# EAGLE board Shruthi-Analog-SVF-v01a (EAGLE 5.09)
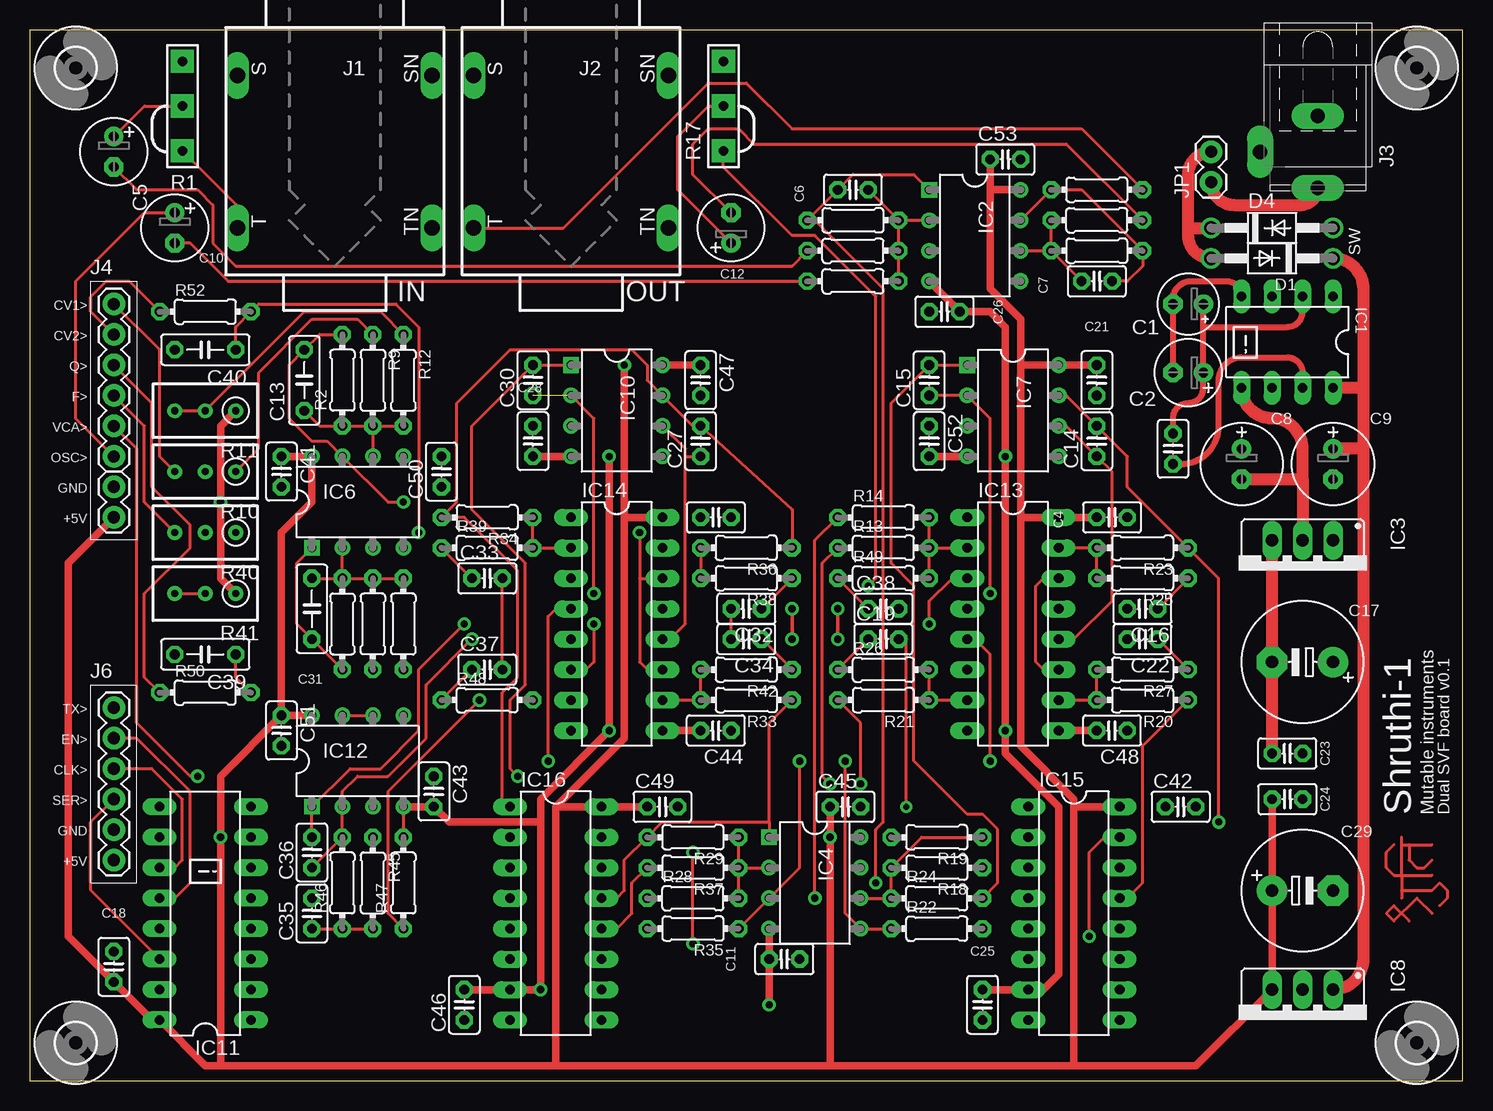
[diagram p0: board, top side]
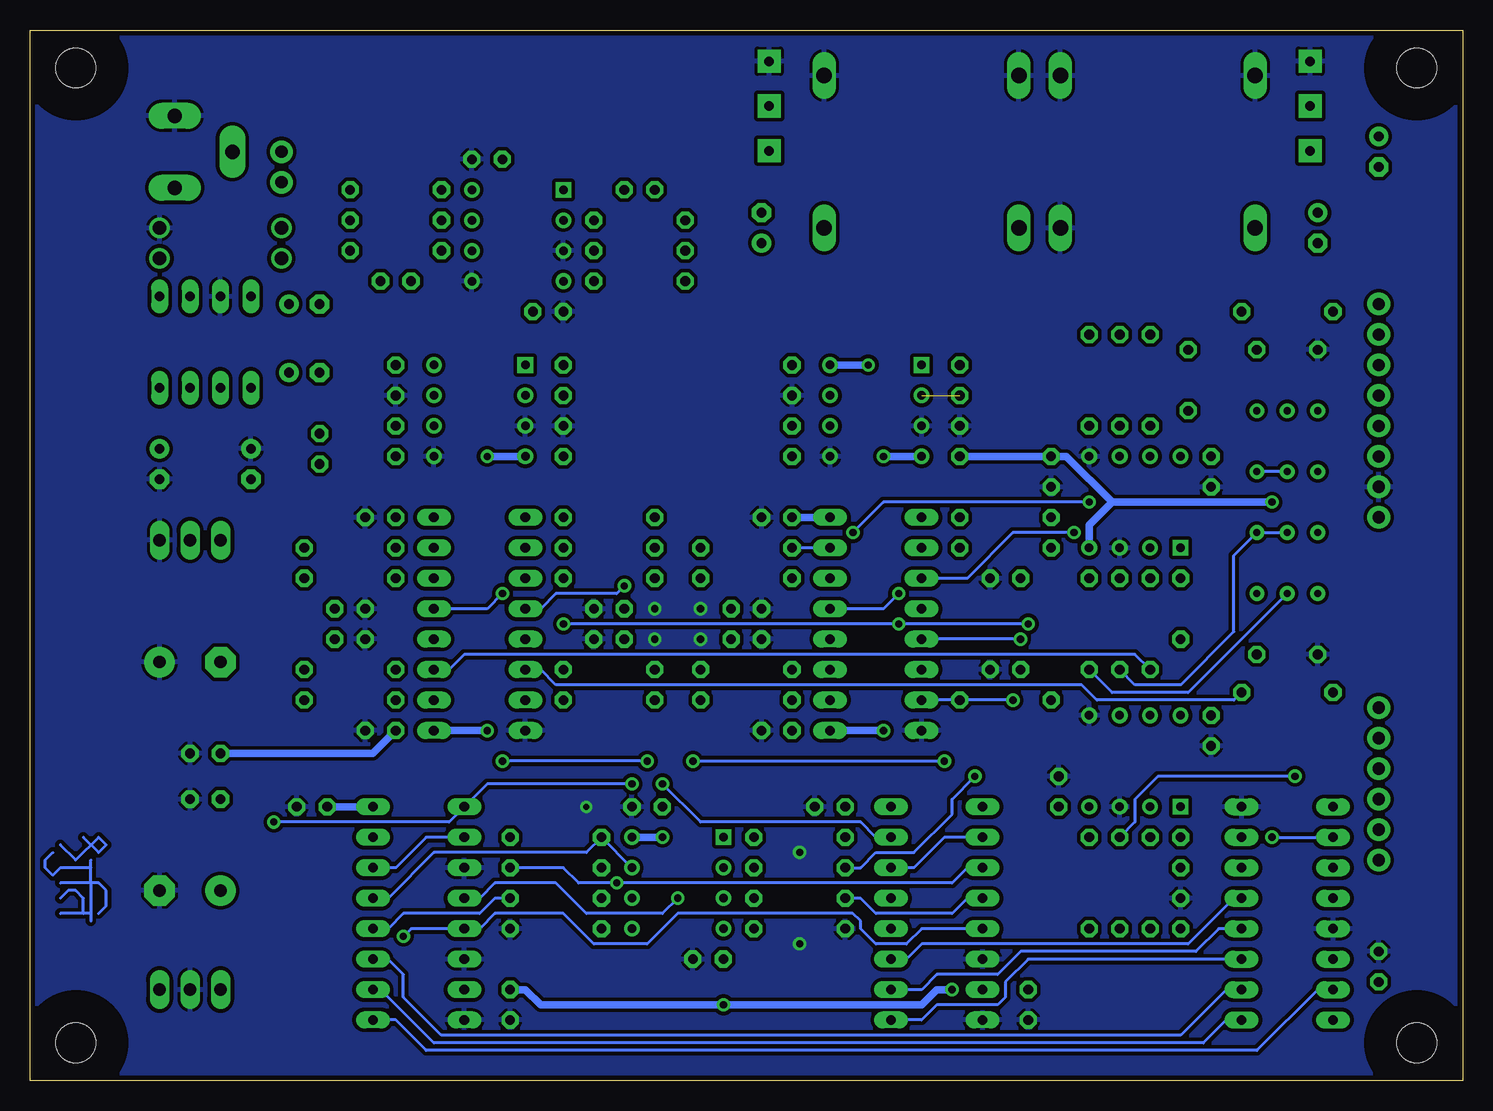
[diagram p1: board, bottom side, seen from below]

Size 119.38 x 87.62 mm. Coordinates in mm from the lower left corner, seen from the top.
Outline: 0,0 119.38,0 119.38,87.62 0,87.62 0,0
Copper layers (1*16): Top 0.035mm / dielectric 1.5mm / Bottom 0.035mm
Design rules "SparkFun_10mil *": minimum track width 10mil, minimum drill 20mil, track to track 10mil, track to pad 10mil, pad to pad 10mil, via to via 10mil, smd to smd 10mil, copper to edge 10mil, drill to drill 10mil, minimum pad ring 12mil, minimum via ring 10mil, stop-mask expansion 4mil, vias tented up to drill 25mil, thermal gap 10mil

## Footprints (pad centres in the part's own frame; a part is rotated, then mirrored left to right if it is on the bottom)
E2,5-5 = drill 0.813 pad 1.6 round: + -1.27,0 | drill 0.813 pad 1.6 octagon: - 1.27,0
E2,5-6 = drill 0.813 pad 1.6 round: + -1.27,0 | drill 0.813 pad 1.6 octagon: - 1.27,0
C025-025X050 = drill 0.813 octagon: 1 -1.27,0; 2 1.27,0
E2,5-7 = drill 0.813 pad 1.6 round: + -1.27,0 | drill 0.813 pad 1.6 octagon: - 1.27,0
C050-025X075 = drill 0.813 octagon: 1 -2.54,0; 2 2.54,0
E5-10,5 = drill 1.016 pad 2.54 round: + -2.54,0 | drill 1.016 pad 2.54 octagon: - 2.54,0
DO41-10 = drill 1.118 round: A 5.08,0; C -5.08,0
DIL08 = drill 0.813 long: 1 -3.81,-3.81; 2 -1.27,-3.81; 3 1.27,-3.81; 4 3.81,-3.81; 5 3.81,3.81; 6 1.27,3.81; 7 -1.27,3.81; 8 -3.81,3.81
DIL08' = drill 0.7 square: 1 -3.81,-3.81 | drill 0.7 round: 2 -1.27,-3.81; 3 1.27,-3.81; 4 3.81,-3.81; 5 3.81,3.81; 6 1.27,3.81; 7 -1.27,3.81; 8 -3.81,3.81
79XXS = drill 1.016 long: GND -2.54,-2.54; IN 0,-2.54; OUT 2.54,-2.54
78XXS = drill 1.016 long: GND 0,-2.54; IN -2.54,-2.54; OUT 2.54,-2.54
DIL16 = drill 0.813 long: 1 -8.89,-3.81; 2 -6.35,-3.81; 3 -3.81,-3.81; 4 -1.27,-3.81; 5 1.27,-3.81; 6 3.81,-3.81; 7 6.35,-3.81; 8 8.89,-3.81; 9 8.89,3.81; 10 6.35,3.81; 11 3.81,3.81; 12 1.27,3.81; 13 -1.27,3.81; 14 -3.81,3.81; 15 -6.35,3.81; 16 -8.89,3.81
NMJ4HC-S = drill 1.3 long: S 5.08,8.115; SN 5.08,-8.115; T -7.62,8.115; TN -7.62,-8.115
SPC4078_LARGER_HOLES = drill 1.2 pad 2.184 long: 1 -3,0; 2 0,-4.8; 3 3,0
1X06 = drill 1.016 pad 1.88 round: 1 0,0; 2 2.54,0; 3 5.08,0; 4 7.62,0; 5 10.16,0; 6 12.7,0
1X02 = drill 1.016 pad 1.88 round: 1 0,0; 2 2.54,0
CABLE_POT_6MM = drill 0.8 pad 1.93 square: A -3.73,0; E 3.73,0; S 0,0
0204/7 = drill 0.813 octagon: 1 -3.81,0; 2 3.81,0
RTRIM3296W = drill 0.61 round: 1 0,-2.54; 2 0,0; 3 0,2.54
3,3 = hole 3.3: 0,0

## Placement (x,y rotation side)
C1  10u  [E2,5-5]  96.52,64.77 180 top
C2  100u  [E2,5-6]  96.52,59.05 180 top
C3  10p  [C025-025X050]  95.25,52.71 270 top
C4  100n  [C025-025X050]  90.17,46.99 0 top
C5  4.7u  [E2,5-6]  6.99,77.47 270 top
C6  68p  [C025-025X050]  68.58,74.3 180 top
C7  100p  [C025-025X050]  88.9,66.67 0 top
C8  100u  [E2,5-7]  100.97,51.44 270 top
C9  100u  [E2,5-7]  108.58,51.44 270 top
C10  4.7u  [E2,5-6]  12.07,71.12 270 top
C11  100n  [C025-025X050]  62.87,10.16 180 top
C12  4.7u  [E2,5-6]  58.42,71.12 90 top
C13  33n  [C050-025X075]  22.86,58.42 90 top
C14  220p  [C025-025X050]  88.9,53.34 90 top
C15  220p  [C025-025X050]  74.93,58.42 90 top
C16  560p  [C025-025X050]  92.71,39.37 180 top
C17  220u  [E5-10,5]  106.05,34.92 180 top
C18  100n  [C025-025X050]  6.99,9.53 90 top
C19  560p  [C025-025X050]  71.12,36.83 0 top
C20  100n  [C025-025X050]  57.15,46.99 0 top
C21  100n  [C025-025X050]  88.9,58.42 270 top
C22  560p  [C025-025X050]  92.71,36.83 180 top
C23  100n  [C025-025X050]  104.78,27.3 180 top
C24  100n  [C025-025X050]  104.78,23.49 0 top
C25  100n  [C025-025X050]  79.38,6.35 90 top
C26  100n  [C025-025X050]  76.2,64.14 0 top
C27  220p  [C025-025X050]  55.88,53.34 90 top
C28  100n  [C025-025X050]  41.91,53.34 270 top
C29  220u  [E5-10,5]  106.05,15.88 0 top
C30  220p  [C025-025X050]  41.91,58.42 90 top
C31  33n  [C050-025X075]  23.5,39.37 270 top
C32  560p  [C025-025X050]  59.69,39.37 180 top
C33  560p  [C025-025X050]  38.1,41.91 0 top
C34  560p  [C025-025X050]  59.69,36.83 180 top
C35  6.8n  [C025-025X050]  23.5,13.97 90 top
C36  100p  [C025-025X050]  23.5,19.05 90 top
C37  560p  [C025-025X050]  38.1,34.29 0 top
C38  560p  [C025-025X050]  71.12,39.37 0 top
C39  33n  [C050-025X075]  14.61,35.56 180 top
C40  33n  [C050-025X075]  14.61,60.96 180 top
C41  100n  [C025-025X050]  20.96,50.8 270 top
C42  100n  [C025-025X050]  95.89,22.86 0 top
C43  100n  [C025-025X050]  33.66,24.13 270 top
C44  100n  [C025-025X050]  57.15,29.21 180 top
C45  100n  [C025-025X050]  67.95,22.86 0 top
C46  100n  [C025-025X050]  36.2,6.35 90 top
C47  100n  [C025-025X050]  55.88,58.42 270 top
C48  100n  [C025-025X050]  90.17,29.21 180 top
C49  100n  [C025-025X050]  52.7,22.86 0 top
C50  100n  [C025-025X050]  34.29,50.8 90 top
C51  100n  [C025-025X050]  20.96,29.21 270 top
C52  100n  [C025-025X050]  74.93,53.34 270 top
C53  100n  [C025-025X050]  81.28,76.84 0 top
D1  1N5819  [DO41-10]  103.5,68.58 180 top
D4  1N5819  [DO41-10]  103.5,71.12 0 top
IC1  LT1054  [DIL08]  104.78,61.59 180 top
IC2  TL072P  [DIL08']  78.74,70.48 270 top
IC3  7905  [79XXS]  106.05,42.55 180 top
IC4  TL072P  [DIL08']  65.41,16.51 270 top
IC6  TL082P  [DIL08']  27.3,48.26 0 top
IC7  TL072P  [DIL08']  81.92,55.88 270 top
IC8  7805  [78XXS]  106.05,5.08 180 top
IC10  TL072P  [DIL08']  48.89,55.88 270 top
IC11  74HC595N  [DIL16]  14.61,13.97 90 top
IC12  TL082P  [DIL08']  27.3,26.67 0 top
IC13  SSM2164P  [DIL16]  81.92,38.1 270 top
IC14  SSM2164P  [DIL16]  48.89,38.1 270 top
IC15  4053N  [DIL16]  87,13.97 270 top
IC16  4053N  [DIL16]  43.81,13.97 270 top
J1  MONOSWS  [NMJ4HC-S]  25.4,78.74 90 top
J2  MONOSWS  [NMJ4HC-S]  45.09,78.74 90 top
J3  [SPC4078_LARGER_HOLES]  107.31,77.47 270 top
J4  [1X06]  6.99,52.07 90 top
J5  [1X02]  6.99,49.53 270 top
J6  [1X06]  6.99,18.41 90 top
JP1  [1X02]  98.42,74.93 90 top
R1  10kA  [CABLE_POT_6MM]  12.7,81.28 270 top
R2  15k  [0204/7]  26.04,58.42 90 top
R3  68  [0204/7]  88.9,74.3 180 top
R4  100k  [0204/7]  68.58,71.75 180 top
R5  10k  [0204/7]  68.58,69.22 0 top
R6  68k  [0204/7]  88.9,69.22 180 top
R7  100k  [0204/7]  68.58,66.67 0 top
R8  33k  [0204/7]  88.9,71.75 0 top
R9  33k  [0204/7]  28.57,58.42 270 top
R10  5k  [RTRIM3296W]  14.61,50.8 90 top
R11  5k  [RTRIM3296W]  14.61,55.88 90 top
R12  33k  [0204/7]  31.11,58.42 270 top
R13  33k  [0204/7]  71.12,44.45 0 top
R14  33k  [0204/7]  71.12,46.99 0 top
R17  10kA  [CABLE_POT_6MM]  57.78,81.28 270 top
R18  33k  [0204/7]  75.56,17.78 180 top
R19  33k  [0204/7]  75.56,20.32 180 top
R20  33k  [0204/7]  92.71,31.75 180 top
R21  33k  [0204/7]  71.12,31.75 180 top
R22  22k  [0204/7]  75.56,12.7 0 top
R23  33k  [0204/7]  92.71,44.45 180 top
R24  33k  [0204/7]  75.56,15.24 0 top
R25  470  [0204/7]  92.71,41.91 180 top
R26  470  [0204/7]  71.12,34.29 0 top
R27  470  [0204/7]  92.71,34.29 180 top
R28  33k  [0204/7]  55.24,15.24 0 top
R29  33k  [0204/7]  55.24,20.32 180 top
R30  33k  [0204/7]  28.57,38.1 90 top
R31  15k  [0204/7]  26.04,38.1 270 top
R32  33k  [0204/7]  31.11,38.1 90 top
R33  33k  [0204/7]  59.69,31.75 180 top
R34  33k  [0204/7]  38.1,46.99 180 top
R35  22k  [0204/7]  55.24,12.7 180 top
R36  33k  [0204/7]  59.69,44.45 180 top
R37  33k  [0204/7]  55.24,17.78 180 top
R38  470  [0204/7]  59.69,41.91 180 top
R39  470  [0204/7]  38.1,44.45 0 top
R40  5k  [RTRIM3296W]  14.61,45.72 90 top
R41  5k  [RTRIM3296W]  14.61,40.64 90 top
R42  470  [0204/7]  59.69,34.29 180 top
R45  100k  [0204/7]  28.57,16.51 270 top
R46  100k  [0204/7]  26.04,16.51 90 top
R47  100k  [0204/7]  31.11,16.51 90 top
R48  470  [0204/7]  38.1,31.75 0 top
R49  470  [0204/7]  71.12,41.91 0 top
R50  33k  [0204/7]  14.61,32.38 0 top
R52  33k  [0204/7]  14.61,64.14 0 top
U$1  [DURGA]  57.78,47.62 0 top
U$2  [3,3]  3.81,84.45 0 top
U$3  [3,3]  115.57,84.45 0 top
U$4  [3,3]  3.81,3.17 0 top
U$5  [3,3]  115.57,3.17 0 top

## Library data of the parts
C1-C53 R2-R14 R18-R42 R45-R50 R52 = rcl
D1 D4 = diode
IC1 = ic-package
IC2 IC4 IC6 IC7 IC10 IC12 = gm-ics
IC3 IC8 = v-reg
IC11 = 74xx-eu
IC13 IC14 = ssm2164
IC15 IC16 = 40xx
J1 J2 = gm-jacks
J3 = con-jack2
J4-J6 JP1 = SparkFun
R1 R17 = pot-cable
U$1 = og-pcb-art
U$2-U$5 = holes

## Nets
BP1: C14.2 IC7.7 IC15.1 R21.2 R23.1
BP2: C27.2 IC10.7 IC16.1 R34.2 R36.1
F1SW0: IC11.15 IC15.9
F1SW1: IC11.1 IC15.10
F1SW2: IC11.2 IC15.11
F2SW0: IC11.3 IC16.9
F2SW1: IC11.4 IC16.10
F2SW2: IC11.5 IC16.11
FILTER1_MIX: IC15.4 R14.1
FILTER1_OUT: IC15.5 IC15.15 IC16.5
FILTER2_OUT: IC16.15 R13.1
FREQ1: C31.2 IC6.1 IC13.11 IC13.14 R31.2
FREQ2: C13.2 IC6.7 IC14.11 IC14.14 R2.2
GND: C4.2 C8.+ C9.- C11.1 C16.2 C17.+ C18.2 C19.2 C20.2 C21.2 C22.2 C23.1 C24.2 C25.1 C26.1 C28.1 C29.- C32.2 C33.2 C34.2 C35.2 C37.2 C38.2 C39.2 C40.2 C41.2 C42.2 C43.1 C44.1 C45.2 C46.1 C47.2 C48.1 C49.2 C50.1 C51.2 C52.1 C53.2 D4.A IC1.3 IC2.3 IC2.5 IC3.GND IC6.3 IC6.5 IC7.3 IC7.5 IC8.GND IC10.3 IC10.5 IC11.8 IC11.13 IC12.3 IC12.5 IC13.8 IC14.8 IC15.3 IC15.6 IC15.8 IC16.6 IC16.8 J1.S J1.SN J1.TN J2.S J2.SN J3.1 J5.1 R1.A R17.A R22.2 R35.2
HP1: IC4.7 IC15.13 R19.2 R20.1
HP2: IC4.1 IC16.13 R29.2 R33.1
LP1: C15.2 IC7.1 IC15.12 R24.2
LP2: C30.2 IC10.1 IC16.12 R37.2
MIX: C6.2 IC2.1 IC16.3 R4.2 R18.1
N$1: C1.+ C2.+ C3.1 IC1.2
N$2: C13.1 IC6.6 R2.1 R9.2 R12.2
N$3: J3.3 JP1.1
N$4: C9.+ D1.C IC1.8 IC8.IN
N$5: C1.- C2.- IC1.4
N$6: C6.1 IC2.2 R4.1 R5.2 R7.2
N$7: R9.1 R10.1 R10.2
N$8: J4.6 R10.3
N$9: R11.2 R11.3 R12.1
N$10: IC14.7 R47.1 R48.2
N$11: C36.1 IC12.2 IC14.5 R46.2
N$12: IC4.6 R18.2 R19.1 R24.1
N$13: IC11.12 J6.5
N$14: IC11.14 J6.3
N$16: IC11.11 J6.4
N$17: C16.1 R25.1
N$18: IC4.2 R28.2 R29.1 R37.1
N$19: C14.1 IC7.6 IC13.12
N$20: C27.1 IC10.6 IC14.12
N$21: IC13.7 R21.1 R26.2
N$22: C35.1 R45.2 R46.1
N$23: IC4.5 IC13.5 R22.1
N$24: IC14.2 R34.1 R39.2
N$25: C12.- R8.2
N$26: IC13.15 R23.2 R25.2
N$27: C19.1 R26.1
N$28: C15.1 IC7.2 IC13.13
N$29: IC13.10 R20.2 R27.2
N$30: C22.1 R27.1
N$32: C12.+ R17.S
N$33: IC4.3 IC14.4 R35.1
N$34: IC14.15 R36.2 R38.2
N$35: C10.+ J4.1
N$36: C3.2 IC1.7
N$38: J1.T R1.E
N$39: C10.- R7.1
N$40: C31.1 IC6.2 R30.2 R31.1 R32.2
N$41: R30.1 R40.1 R40.2
N$42: J4.3 R40.3
N$43: R32.1 R41.2 R41.3
N$44: C30.1 IC10.2 IC14.13
N$45: J4.2 R45.1
N$46: C32.1 R38.1
N$47: J2.T R3.1
N$49: C33.1 R39.1
N$50: IC14.10 R33.2 R42.2
N$51: C34.1 R42.1
N$56: C36.2 IC12.1 IC13.3 IC14.6
N$58: C8.- IC1.5 IC3.IN
N$59: D1.A D4.C JP1.2
N$61: IC12.6 IC12.7
N$62: IC15.2 IC15.14
N$63: C7.2 IC2.7 R3.2 R6.1
N$64: C37.1 R48.1
N$65: C38.1 R49.1
N$66: C5.+ R1.S
N$67: IC13.2 R13.2 R14.2 R49.2
N$68: IC13.4 R17.E
N$69: J4.4 R50.1
N$70: C7.1 IC2.6 R6.2 R8.1
N$72: C5.- R5.1
N$73: J4.5 R52.1
N$74: IC16.2 IC16.14
N$75: IC16.4 R28.1
RES1_CV: C39.1 IC13.6 R50.2
RES2_CV: C40.1 IC14.3 R52.2
VCC: C4.1 C18.1 C20.1 C21.1 C24.1 C29.+ C41.1 C42.1 C45.1 C47.1 C49.1 C51.1 C53.1 IC2.8 IC4.8 IC6.8 IC7.8 IC8.OUT IC10.8 IC11.10 IC11.16 IC12.8 IC13.16 IC14.16 IC15.16 IC16.16 J5.2
VEE: C11.2 C17.- C23.2 C25.2 C26.2 C28.2 C43.2 C44.2 C46.2 C48.2 C50.2 C52.2 IC2.4 IC3.OUT IC4.4 IC6.4 IC7.4 IC10.4 IC12.4 IC13.9 IC14.9 IC15.7 IC16.7 R11.1 R41.1 R47.2

## Tracks (layer width: path | path; a pad name or v marks a point on that pad's centre or on a via)
BP1  (via drill 0.6)
  Top 0.254: IC7.7 86.36,57.15 C14.2 91.44,52.07 91.44,49.53 R23.1 99.06,41.91 v99.06,21.59 | R21.2 69.22,29.84 v69.22,24.76
  Bottom 0.254: v99.06,21.59 84.45,21.59 IC15.1 81.28,24.76 v69.22,24.76
BP2
  Top 0.254: R36.1 63.5,47.62 C27.2 55.24,54.61 IC10.7 51.44,58.42 51.44,59.69 50.16,60.96 40.01,60.96 35.56,56.52 35.56,48.26 R34.2 36.2,46.99 40.64,42.55 40.64,33.66 39.37,32.38 39.37,23.49 IC16.1
F1SW0
  Bottom 0.254: IC11.15 12.07,7.62 17.14,2.54 86.36,2.54 88.9,5.08 IC15.9
F1SW1
  Bottom 0.254: IC11.1 19.68,5.08 21.59,3.17 85.72,3.17 90.17,7.62 IC15.10
F1SW2
  Bottom 0.254: IC11.2 19.68,7.62 23.5,3.81 85.09,3.81 88.27,6.98 88.27,8.89 89.53,10.16 IC15.11
F2SW0
  Bottom 0.254: IC11.3 36.2,10.16 38.1,8.26 38.1,6.98 38.73,6.35 43.81,6.35 45.09,5.08 IC16.9
F2SW1
  Bottom 0.254: IC11.4 20.32,12.7 22.23,10.79 36.83,10.79 38.73,8.89 43.81,8.89 45.09,7.62 IC16.10
F2SW2
  Bottom 0.254: IC11.5 19.05,15.24 22.86,11.43 45.09,11.43 46.35,10.16 IC16.11
FILTER1_MIX  (via drill 0.6)
  Top 0.254: R14.1 65.41,45.09 v65.41,15.24
  Bottom 0.254: v65.41,15.24 66.67,13.97 73.03,13.97 75.56,16.51 80.64,16.51 81.92,15.24 IC15.4
FILTER1_OUT  (via drill 0.6)
  Top 0.254: IC15.15 89.53,20.32 88.27,19.05 v88.27,12.07
  Bottom 0.254: IC16.5 45.09,12.7 46.35,11.43 48.89,11.43 50.16,12.7 50.16,13.34 50.8,13.97 65.41,13.97 67.95,11.43 72.39,11.43 74.93,13.97 80.64,13.97 81.92,12.7 IC15.5 87.63,12.7 v88.27,12.07
FILTER2_OUT  (via drill 0.6)
  Top 0.254: R13.1 66.04,43.18 66.04,25.4 v66.67,24.76
  Bottom 0.254: IC16.15 48.89,20.32 50.16,21.59 63.5,21.59 v66.67,24.76
FREQ1
  Top 0.254: IC6.1 22.23,43.18 22.23,38.1 C31.2 R31.2 | IC13.14 84.45,41.91 83.82,41.28 83.82,34.92 84.45,34.29 IC13.11
  Bottom 0.254: R31.2 27.3,35.56 83.19,35.56 84.45,34.29 IC13.11
FREQ2  (via drill 0.6)
  Top 0.254: R2.2 24.13,62.23 C13.2 21.59,59.69 21.59,55.25 23.5,53.34 24.77,53.34 IC6.7 29.84,48.26 v31.11,48.26 | IC14.11 51.44,34.29 50.8,34.92 50.8,41.91 | v50.8,45.72 50.8,41.91 | 50.8,41.91 IC14.14
  Bottom 0.254: v31.11,48.26 48.26,48.26 v50.8,45.72
GND  (via drill 0.51, 0.6)
  Top 0.254: C37.2 C33.2 | C34.2 C32.2 | v73.03,22.86 73.03,36.83 C19.2 | v55.24,11.43 v55.24,19.05
  Top 0.305: v63.5,36.83 v63.5,39.37 | v67.31,36.83 v67.31,39.37
  pour Bottom (isolate 0.305): 0.64,87 0.64,0.64 118.75,0.64 118.75,87
HP1
  Top 0.254: R20.1 92.71,27.94 92.71,16.51 91.44,15.24 IC15.13
  Bottom 0.254: IC15.13 89.53,15.24 85.72,19.05 73.03,19.05 R19.2 IC4.7
HP2
  Top 0.254: IC16.13 48.89,15.24 49.53,15.88 49.53,18.41 R29.2 52.7,21.59 61.59,21.59 | R33.1 61.59,29.84 61.59,21.59 | 61.59,21.59 IC4.1
LP1
  Top 0.254: IC7.1 C15.2 71.75,56.52 71.75,43.18 73.66,41.28 73.66,26.67 78.11,22.22 79.38,22.22 80.64,20.95 80.64,16.51 R24.2
  Bottom 0.254: R24.2 80.64,15.24 81.92,13.97 88.27,13.97 89.53,12.7 IC15.12
LP2  (via drill 0.6)
  Top 0.254: R37.2 50.16,16.51 50.16,13.97 48.89,12.7 IC16.12 | v40.64,25.4 40.01,26.04 40.01,31.75 41.27,33.02 41.27,43.18 36.83,47.62 36.83,54.61 C30.2 IC10.1
  Bottom 0.254: R37.2 50.16,17.78 48.89,19.05 45.72,19.05 42.55,22.22 42.55,23.49 v40.64,25.4
MIX  (via drill 0.6)
  Top 0.254: IC2.1 73.66,75.56 68.58,75.56 C6.2 R4.2 65.41,71.75 71.12,66.04 71.12,21.59 70.48,20.95 v70.48,16.51
  Bottom 0.254: IC16.3 41.27,17.78 42.55,16.51 v70.48,16.51 73.66,16.51 74.93,17.78 R18.1
N$1
  Top 0.508: 97.79,62.87 C2.+ 97.79,57.79 arc-90 96.52,56.52 arc90 95.25,55.25 C3.1 | 97.79,62.87 C1.+ | IC1.2 106.05,64.14 arc-90 104.78,62.87 97.79,62.87
N$2
  Top 0.254: R9.2 R12.2 | R9.2 R2.1 24.13,54.61 C13.1 | R9.2 IC6.6
N$3
  Top 1.016: J3.3 arc-90 105.87,73.03 100.33,73.03 arc-90 JP1.1
N$4
  Top 1.016: IC8.IN arc90 111.12,10.16 111.12,52.71 | D1.C arc-90 111.12,66.04 111.12,57.79 | 111.12,52.71 111.12,57.79 | 111.12,57.79 IC1.8 | 111.12,52.71 C9.+
N$5
  Top 0.508: IC1.4 arc90 99.69,66.67 96.52,66.67 arc90 C1.- C2.-
N$6
  Top 0.254: R4.1 R5.2 R7.2 | R4.1 C6.1 | R4.1 IC2.2
N$7
  Top 0.254: R9.1 27.3,63.5 23.5,63.5 19.05,59.05 19.05,52.71 R10.1
  Bottom 0.254: R10.2 R10.1
N$8
  Top 0.254: J4.6 10.79,60.96 10.79,52.07 R10.3
N$9
  Top 0.254: R11.3 R11.2 22.86,64.14 29.21,64.14 R12.1
N$10  (via drill 0.6)
  Top 0.254: R47.1 29.84,13.97 29.84,24.13 v37.47,31.75
  Bottom 0.254: v37.47,31.75 R48.2 IC14.7
N$11  (via drill 0.6)
  Top 0.254: C36.1 R46.2 IC12.2 26.04,24.13 27.3,25.4 29.84,25.4 33.02,28.57 33.02,33.02 v36.83,36.83
  Bottom 0.254: v36.83,36.83 IC14.5
N$12
  Top 0.254: IC4.6 R24.1 R18.2 74.3,20.32 R19.1
N$13
  Top 0.254: J6.5 8.89,28.57 13.34,24.13 13.34,16.51 12.07,15.24 IC11.12
N$14
  Top 0.254: J6.3 5.08,21.59 5.08,15.88 IC11.14
N$15
  Bottom 0.254: 116.84,19.68 115.57,18.41 113.67,20.32 113.03,19.68 113.67,19.05 114.94,20.32
N$16
  Top 0.254: J6.4 10.16,26.04 12.7,23.49 12.7,18.41 12.07,17.78 IC11.11
N$17
  Top 0.254: C16.1 R25.1
N$18
  Top 0.254: R37.1 IC4.2 | R37.1 R29.1 | R28.2 R37.1
N$19
  Top 0.254: IC7.6 86.36,54.61 C14.1 90.17,50.8 90.17,40.01 87,36.83 IC13.12
N$20
  Top 0.254: IC14.12 53.34,36.83 54.61,38.1 54.61,52.07 | 54.61,52.07 54.61,52.71 IC10.6 | 54.61,52.07 C27.1
N$21
  Top 0.254: R26.2 R21.1 IC13.7
N$22
  Top 0.254: R45.2 R46.1 C35.1
N$23  (via drill 0.6)
  Top 0.254: R22.1 IC4.5 67.95,13.97 v67.95,26.67 | IC13.5 78.74,36.83 80.01,35.56 v80.01,26.67
  Bottom 0.254: v67.95,26.67 v80.01,26.67
N$24
  Top 0.254: IC14.2 R39.2 R34.1
N$25
  Top 0.254: R8.2 86.36,78.11 60.33,78.11 59.05,79.38 56.52,79.38 55.24,78.11 55.24,75.56 C12.-
N$26
  Top 0.254: IC13.15 R23.2 R25.2
N$27
  Top 0.254: R26.1 C19.1
N$28  (via drill 0.6)
  Top 0.254: C15.1 IC7.2 80.01,55.25 v80.01,40.64
  Bottom 0.254: v80.01,40.64 81.28,39.37 IC13.13
N$29
  Top 0.254: R27.2 R20.2 IC13.10
N$30
  Top 0.254: C22.1 R27.1
N$32
  Top 0.254: R17.S 56.52,81.28 53.98,78.74 53.98,74.3 C12.+
N$33  (via drill 0.6)
  Top 0.254: IC14.4 43.81,39.37 43.18,38.73 v43.18,26.67 | v64.14,26.67 64.14,17.78 IC4.3 R35.1
  Bottom 0.254: v64.14,26.67 v43.18,26.67
N$34
  Top 0.254: R36.2 R38.2
  Bottom 0.254: IC14.15 R36.2
N$35
  Top 0.254: J4.1 3.81,55.25 3.81,66.67 9.53,72.39 C10.+
N$36
  Top 0.508: C3.2 95.89,51.44 arc90 99.06,54.61 99.06,58.42 arc-90 100.97,60.33 104.78,60.33 arc-90 106.05,59.05 IC1.7
N$38
  Top 0.254: R1.E 17.29,72.97 J1.T
N$39
  Top 0.254: C10.- 13.34,69.85 16.51,66.67 R7.1
N$40
  Top 0.254: R31.1 IC6.2 | C31.1 R31.1 | R31.1 R30.2 R32.2
N$41
  Bottom 0.254: R30.1 27.3,33.02 23.5,33.02 19.05,37.47 19.05,43.82 R40.1 R40.2
N$42
  Top 0.254: J4.3 9.53,54.61 9.53,48.26 R40.3
N$43
  Top 0.254: R41.3 R41.2
  Bottom 0.254: R41.2 22.86,32.38 29.21,32.38 R32.1
N$44  (via drill 0.6)  (1 unrouted)
  Top 0.254: IC10.2 46.99,55.25 v46.99,40.64
  Bottom 0.254: v46.99,40.64 48.26,39.37 IC14.13
N$45  (via drill 0.6)
  Top 0.254: J4.2 8.89,52.71 8.89,29.84 13.34,25.4 v13.97,25.4
  Bottom 0.254: v13.97,25.4 25.4,25.4 27.3,23.49 27.3,21.59 R45.1
N$46
  Top 0.254: C32.1 R38.1
N$47
  Top 0.254: R3.1 87.63,79.38 63.5,79.38 59.69,83.19 56.52,83.19 44.45,71.12 J2.T
N$49
  Top 0.254: C33.1 R39.1
N$50
  Top 0.254: IC14.10 R33.2 R42.2
N$51
  Top 0.254: C34.1 R42.1
N$52
  Bottom 0.254: 114.3,17.78 114.3,18.41 | 114.3,16.51 114.3,17.78 | 114.3,16.51 114.3,13.97 | 114.3,13.97 114.3,13.34 | 114.94,13.97 116.84,13.97 | 114.3,13.97 114.94,13.97 | 114.94,13.97 114.94,15.24 115.57,15.88 116.2,15.88 116.84,15.24 | 114.3,17.78 116.84,17.78 117.47,17.14 118.11,17.78 118.11,18.41 117.47,19.05 | 114.3,16.51 116.84,16.51 | 114.3,16.51 113.67,16.51 113.03,15.88 113.03,14.61 113.67,13.97
N$53
  Top 0.254: 116.84,13.97 115.57,15.24 113.67,13.34 113.03,13.97 113.67,14.61 114.94,13.34
N$54
  Top 0.254: 114.3,15.88 114.3,15.24 | 114.3,17.14 114.3,15.88 | 114.3,17.14 114.3,19.68 | 114.3,19.68 114.3,20.32 | 114.94,19.68 116.84,19.68 | 114.3,19.68 114.94,19.68 | 114.94,19.68 114.94,18.41 115.57,17.78 116.2,17.78 116.84,18.41 | 114.3,15.88 116.84,15.88 117.47,16.51 118.11,15.88 118.11,15.24 117.47,14.61 | 114.3,17.14 116.84,17.14 | 114.3,17.14 113.67,17.14 113.03,17.78 113.03,19.05 113.67,19.68
N$56  (via drill 0.6)
  Top 0.254: C36.2 IC12.1 26.67,26.04 29.21,26.04 32.38,29.21 32.38,34.29 v36.2,38.1 | IC13.3 76.83,41.91 74.93,40.01 v74.93,38.1 | IC14.6 46.35,34.29 46.99,34.92 v46.99,38.1
  Bottom 0.254: v36.2,38.1 v46.99,38.1 v74.93,38.1
N$58
  Top 1.016: IC1.5 arc90 103.5,55.25 arc-90 106.05,52.71 106.05,50.16 | 106.05,50.16 IC3.IN | C8.- 106.05,50.16
N$59
  Top 1.016: JP1.2 arc90 96.52,75.56 96.52,71.12 | 96.52,71.12 96.52,70.48 arc90 D1.A | 96.52,71.12 D4.C
N$61
  Top 0.254: IC12.7 IC12.6
N$62
  Bottom 0.254: IC15.2 86.36,20.32 88.9,17.78 IC15.14
N$63
  Top 0.254: C7.2 91.44,66.67 92.71,67.95 R6.1 87.63,74.3 R3.2 IC2.7
N$64
  Top 0.254: R48.1 C37.1
N$65
  Top 0.254: C38.1 R49.1
N$66
  Top 0.254: R1.S 9.53,81.28 C5.+
N$67
  Top 0.254: R13.2 R14.2 | R49.2 R13.2 | R13.2 IC13.2
N$68  (via drill 0.6)
  Top 0.254: R17.E 57.78,76.2 63.5,70.48 65.41,70.48 70.48,65.41 70.48,41.91 v69.85,41.28
  Bottom 0.254: v69.85,41.28 70.48,40.64 75.56,40.64 76.83,39.37 IC13.4
N$69
  Top 0.254: J4.4 10.16,56.52 10.16,49.53 13.34,46.36 13.34,44.45 9.53,40.64 9.53,33.66 R50.1
N$70
  Top 0.254: IC2.6 R6.2 | R6.2 R8.1 | R6.2 C7.1
N$72
  Top 0.254: C5.- 8.89,74.3 13.97,74.3 15.24,73.03 15.24,69.85 17.14,67.95 63.5,67.95 R5.1
N$73
  Top 0.254: J4.5 5.08,64.14 5.08,65.41 6.35,66.67 8.26,66.67 R52.1
N$74
  Bottom 0.254: IC16.2 43.18,20.32 45.72,17.78 IC16.14
N$75
  Bottom 0.254: IC16.4 41.27,15.24 42.55,13.97 48.89,13.97 50.16,15.24 R28.1
RES1_CV
  Top 0.254: C39.1 17.14,33.66 R50.2
  Bottom 0.254: R50.2 19.05,31.75 30.48,31.75 31.75,33.02 75.56,33.02 76.83,34.29 IC13.6
RES2_CV  (via drill 0.6)
  Top 0.254: v32.38,45.72 32.38,62.87 30.48,64.77 19.05,64.77 R52.2 17.14,62.87 C40.1
  Bottom 0.254: IC14.3 41.27,41.91 37.47,45.72 v32.38,45.72
VCC  (via drill 0.6)
  Top 0.61: 80.01,74.3 80.01,66.04 82.55,63.5 82.55,59.69 | 80.01,74.3 C53.1 | 80.01,74.3 IC2.8 | IC10.8 C47.1 | 49.53,46.99 49.53,28.57 43.81,22.86 | 49.53,46.99 v49.53,59.69 | J5.2 3.18,43.18 3.18,12.07 C18.1 10.16,5.08 IC11.16 14.61,1.27 15.88,1.27 | 15.88,1.27 43.81,1.27 | 43.81,1.27 66.67,1.27 | 66.67,1.27 87,1.27 | 87,1.27 97.16,1.27 IC8.OUT C29.+ C24.1 | 43.81,1.27 43.81,22.86 | 66.67,1.27 v66.67,20.32 C45.1 | 82.55,46.99 82.55,27.94 87,23.49 87,22.86 | 82.55,46.99 82.55,59.69 | 87,1.27 87,22.86 | C51.1 IC12.8 | C51.1 15.88,25.4 v15.88,20.32 15.88,1.27 | C51.1 20.96,45.72 23.5,48.26 IC6.8 C41.1 | 87,22.86 IC15.16 | C21.1 IC7.8 82.55,59.69 | 43.81,22.86 IC16.16 C49.1 | 82.55,46.99 IC13.16 C4.1 | 49.53,46.99 IC14.16
  Bottom 0.254: v15.88,20.32 IC11.10
  Bottom 0.61: v49.53,59.69 IC10.8 | IC15.16 C42.1 | v66.67,20.32 IC4.8 | IC14.16 C20.1
VEE  (via drill 0.6)
  Top 0.254: IC12.4 R47.2
  Top 0.61: IC7.4 C52.2 | IC4.4 C11.2 v61.59,6.35 | IC14.9 C44.2 | 42.55,21.59 v42.55,7.62 IC16.7 C46.2 | 42.55,21.59 42.55,23.49 v48.26,29.21 v48.26,52.07 | IC13.9 C48.2 | IC10.4 C28.2 | IC12.4 C43.2 34.93,21.59 42.55,21.59 | C25.2 IC15.7 84.45,7.62 85.72,8.89 85.72,22.86 81.28,27.3 v81.28,29.21 v81.28,52.07 81.28,62.87 80.01,64.14 C26.2 IC2.4 | R41.1 15.88,41.91 v15.88,48.26 15.88,54.61 R11.1
  Top 1.016: C23.2 C17.- IC3.OUT
  Bottom 0.61: v81.28,52.07 IC7.4 | v48.26,29.21 IC14.9 | v81.28,29.21 IC13.9 | C28.2 C50.2 33.02,52.07 29.21,48.26 | 29.21,48.26 v15.88,48.26 | 29.21,48.26 31.11,46.36 IC6.4 | C48.2 90.8,27.3 C23.2 | v42.55,7.62 43.81,7.62 45.09,6.35 v61.59,6.35 76.83,6.35 78.11,7.62 C25.2 | v48.26,52.07 IC10.4

## Text on the board
tPlace: CV1> | CV2> | Q> | F> | VCA> | OSC> | GND | +5V | TX> | EN> | CLK> | SER> | Shruthi-1 | Mutable instruments | GND | +5V
tNames: SW | IN | OUT | Dual SVF board v0.1